# Altium PCB USB-NORA-W1.PcbDoc (part 2 of 3)
Units mm, origin at the board's own origin, x right, y up, seen from the top; angles counter-clockwise.
Board outline 61.5 x 18 mm, 4 copper layers (Top Layer, Layer 2, Layer 3, Bottom Layer), stack 2.472 mm thick; 80 components, 75 nets, 307 pads, 219 vias.
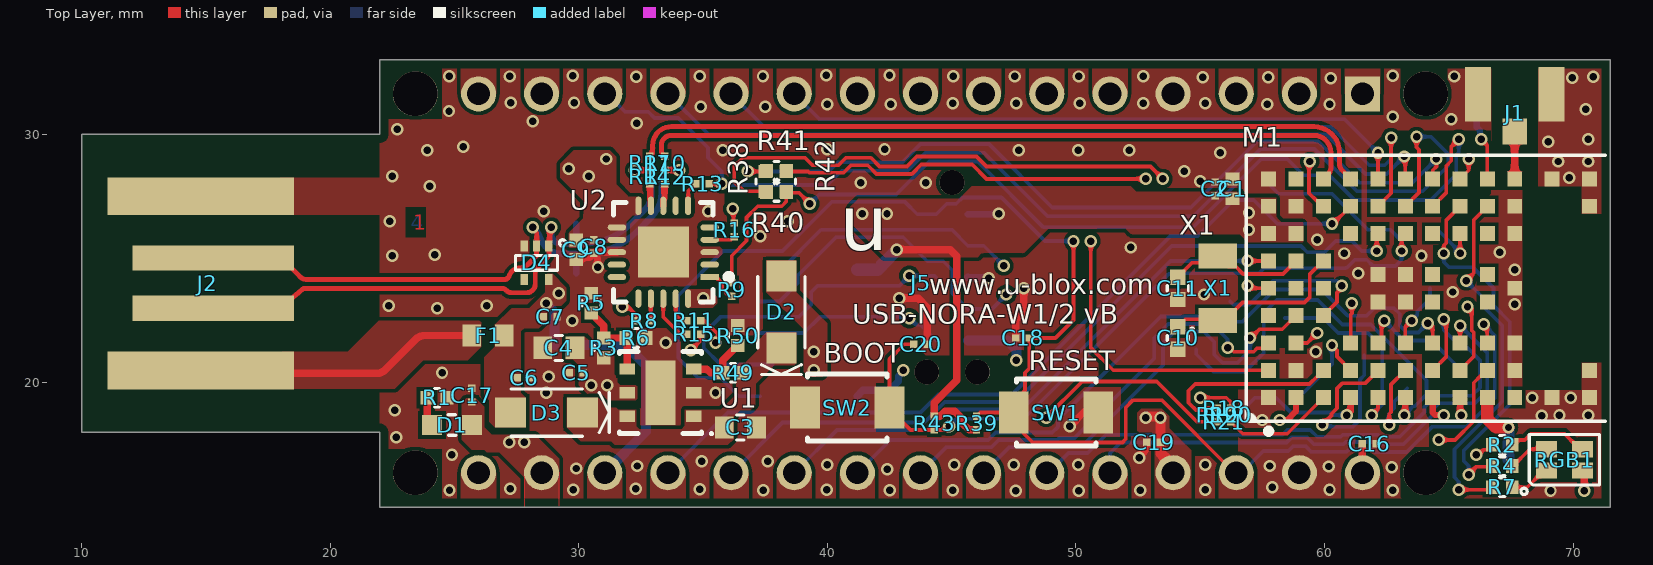
[diagram p0: Top Layer view]

## Via types
v1: diameter 0.5/0.5/0.5/0.5 (per signal layer), hole 0.3, Top Layer to Bottom Layer, tented both sides, 219 vias

## Nets (pads, with @x,y where several pads share a name; then routed paths per layer and width w, separated by ;. In a path a pad name is that pad's centre, name@x,y a point inside that pad or via, vN(x,y) a via of type N, cw(c..) or ccw(c..) an arc to the next point about the centre after c; other vN are vias at no path point) (continued)
GPIO35: (continued)
  Layer 3 w0.15: J5.14@28.507,31.62 26.4,29.513 26.4,25.55 27.75,24.2 29.4,24.2 33.2,20.4 35.1,20.4 36.8,22.1 52.3,22.1 54.971,19.429 v1(55,19.4)
GPIO35-1: M1.C2 R18.1 R19.2 | length 7.5
  Top Layer w0.15: R19.2@55.675,18.983 55.255,18.983 55.172,18.9 54.828,18.9 54.6,19.128 54.525,19.203 54.525,19.675 54.8,19.95 59.4,19.95 59.725,20.275 M1.C2@59.95,20.5
GPIO36: J5.16 M1.B1 | length 35.7
  Top Layer w0.25: v1(58.2,18.5) 58.5,18.5 58.85,18.85 M1.B1@58.85,19.4
  Layer 3 w0.15: J5.16@25.967,16.38 25.967,17.459 26.658,18.15 28.55,18.15 29.25,17.45 51.936,17.45 52.136,17.65 57.45,17.65 58.2,18.4 v1(58.2,18.5)
GPIO37: J5.15 R19.1 R21.2 | length 43.1
  Top Layer w0.15: v1(48.8,18.6) 50.25,20.05 53.25,20.05 54.867,18.433 R19.1@55.675,18.433
  Layer 3 w0.15: J5.15@25.967,31.62 25.967,31.389 25.967,24.283 26.85,23.4 26.85,20.4 29.485,17.765 47.965,17.765 48.733,18.533 v1(48.8,18.6)
GPIO37-1: M1.C1 R20.1 R21.1 | length 4.5
  Top Layer w0.15: R20.1@56.225,18.433 56.708,17.95 58.5,17.95 M1.C1@59.95,19.4
GPIO38: J5.5 M1.A2 | length 18
  Top Layer w0.15: v1(50.6,25.7) 50.6,21.4 51.5,20.5 M1.A2@57.7,20.5
  Layer 3 w0.15: v1(50.6,25.7) 51.367,26.467 J5.5@51.367,31.62
GPIO43/UART0-TXD: M1.G8 R9.2 R40.1 R42.2 | length 40.9
  Top Layer w0.15: R9.2@36.15,24.025 36.15,25.11 36.75,25.71 36.75,26.65 37.2,27.1 38.162,27.1 38.35,27.288 R40.1@38.35,27.675 38.378,27.647 38.853,27.647 v1(39.3,27.2) ; M1.G8@64.35,27.1 64.9,27.65 64.9,28.728 65.1,28.928 65.1,29.5 v1(65.4,29.8)
  Bottom Layer w0.15: v1(39.3,27.2) 39.675,27.575 42.775,27.575 44.1,28.9 46.05,28.9 48.7,26.25 54.7,26.25 57.45,29 58.5,29 59.15,28.35 60.2,28.35 61.2,27.35 64.274,27.35 65.3,28.376 65.3,29.172 65.4,29.272 v1(65.4,29.8)
GPIO43/UART0-TXD_NANO: J5.1 R41.1 R42.1 | length 25.9
  Top Layer w0.15: R41.1@38.35,28.54 R42.1@38.35,28.5 39.226,28.5 39.276,28.45 40.65,28.45 40.95,28.75 41.626,28.75 41.976,28.4 43.4,28.4 43.775,28.775 45.825,28.775 46.4,28.2 v1(52.8,28.2)
  Layer 3 w0.15: v1(52.8,28.2) 53.5,27.5 55.55,27.5 56.35,28.3 58.1,28.3 59.3,29.5 59.407,29.5 J5.1@61.527,31.62
GPIO44/UART0-RXD: M1.G9 R8.2 R38.2 R41.2 | length 52.7
  Top Layer w0.15: v1(31.75,23.05) 31.99,23.05 32.35,22.69 R8.2@32.35,22.5 ; v1(36.8,28.5) 37.525,28.5 R41.2@37.55,28.525 ; M1.G9@64.35,28.2 64.35,28.55 64.5,28.7 v1(64.5,29)
  Layer 3 w0.15: v1(31.75,23.05) 31.4,23.4 31.2,23.4 29.7,24.9 28,24.9 27.1,25.8 27.1,27.6 29.35,29.85 34.45,29.85 35.8,28.5 v1(36.8,28.5)
  Bottom Layer w0.15: v1(36.8,28.5) 40.05,28.5 40.414,28.864 43.014,28.864 43.75,29.6 46.5,29.6 49.05,27.05 54.622,27.05 57.272,29.7 59.75,29.7 61.4,28.05 63.55,28.05 v1(64.5,29)
GPIO44/UART0-RXD_NANO: J5.2 R38.1 R40.2 | length 27.6
  Top Layer w0.15: R38.1@37.5,27.7 36.65,27.7 36.25,28.1 36.25,28.7 36.6,29.05 39.1,29.05 39.4,28.75 40.45,28.75 40.75,29.05 41.75,29.05 42.1,28.7 43.2,28.7 43.6,29.1 46,29.1 46.4,28.7 53,28.7 v1(53.5,28.2)
  Layer 3 w0.15: v1(53.5,28.2) 53.5,28.65 54.8,29.95 57.45,29.95 58.987,31.488 J5.2@58.987,31.62
GPIO45/UART0-RTS: J5.13 M1.F8 R13.2 | length 45.4
  Top Layer w0.15: R13.2@35.25,28.003 35.252,28.002 35.748,28.002 v1(35.75,28) ; M1.F8@63.25,27.1 63.8,27.65 63.8,29.372 63.7,29.472 v1(63.7,29.9)
  Bottom Layer w0.15: J5.13@31.047,31.62 31.148,31.62 31.863,30.905 32.795,30.905 33.05,30.65 34,30.65 35.2,29.45 35.2,29.05 35.75,28.5 v1(35.75,28) 35.8,27.95 40,27.95 40.575,28.525 43.225,28.525 43.95,29.25 46.3,29.25 48.85,26.7 54.726,26.7 57.426,29.4 59.6,29.4 61.3,27.7 63.95,27.7 64.975,28.725 64.975,29.197 64.281,29.891 63.709,29.891 v1(63.7,29.9)
GPIO46: M1.H7 TP11.1 | length 2.1
  Top Layer w0.15: v1(65.45,25.2) M1.H7@65.45,26
  Bottom Layer w0.15: TP11.1@64.525,26.15 64.55,26.15 65.45,25.25 v1(65.45,25.2)